# EAGLE board GW-RFM-RS485-V30-003 (EAGLE 7.7.0)
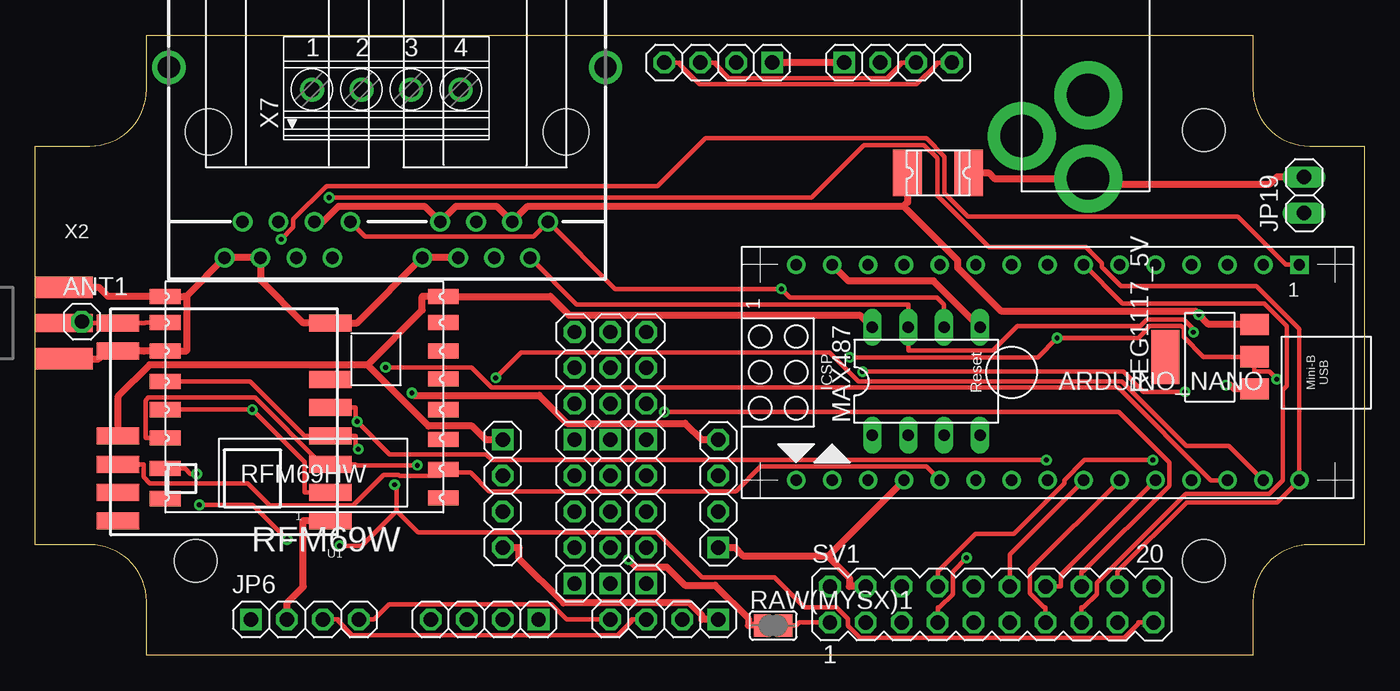
[diagram p0: board, top side]
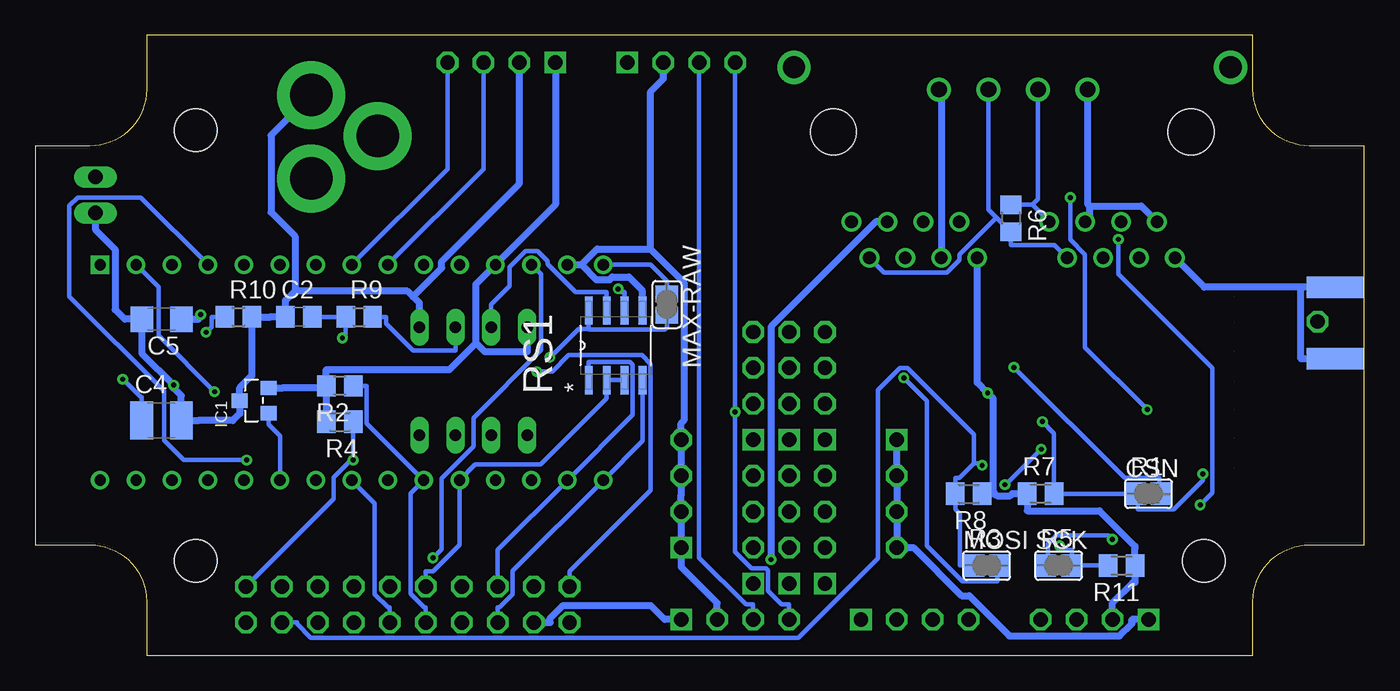
[diagram p1: board, bottom side, seen from below]

Size 93.9 x 43.83 mm. Coordinates in mm from the lower left corner, seen from the top.
Outline: 0,36.02 3.85,36.02 arc90 7.85,40.02 7.85,43.83 86.05,43.83 86.05,40.02 arc90 90.05,36.02 93.9,36.02 93.9,7.82 90.05,7.82 arc90 86.05,3.81 86.05,0 7.85,0 7.85,3.81 arc90 3.85,7.82 0,7.82 0,36.02
Copper layers (1*16): Top 0.035mm / dielectric 1.5mm / Bottom 0.035mm
Design rules "default": minimum track width 6mil, minimum drill 0.35mm, track to track 6mil, track to pad 6mil, pad to pad 6mil, via to via 6mil, smd to smd 6mil, copper to edge 40mil, drill to drill 6mil, minimum pad ring 10mil, minimum via ring 8mil, stop-mask expansion 4mil, vias tented up to drill 0mil, thermal gap 10mil
Net classes: 0 default: width 0.305 mm; 1 Power: width 0.508 mm
Holes 3 mm at 11.32,6.69 82.58,6.69 82.58,37.14

## Footprints (pad centres in the part's own frame; a part is rotated, then mirrored left to right if it is on the bottom)
1X01 = drill 1.016 octagon: 1 0,0
ARDUINO_NANO = drill 0.8 square: 1 -20.32,-7.62 | drill 0.8: 2 -17.78,-7.62; 3 -15.24,-7.62; 4 -12.7,-7.62; 5 -10.16,-7.62; 6 -7.62,-7.62; 7 -5.08,-7.62; 8 -2.54,-7.62; 9 0,-7.62; 10 2.54,-7.62; 11 5.08,-7.62; 12 7.62,-7.62; 13 10.16,-7.62; 14 12.7,-7.62; 15 15.24,-7.62; 16 15.24,7.62; 17 12.7,7.62; 18 10.16,7.62; 19 7.62,7.62; 20 5.08,7.62; 21 2.54,7.62; 22 0,7.62; 23 -2.54,7.62; 24 -5.08,7.62; 25 -7.62,7.62; 26 -10.16,7.62; 27 -12.7,7.62; 28 -15.24,7.62; 29 -17.78,7.62; 30 -20.32,7.62
C0805 = smd 1.3 x 1.5: 1 -0.95,0; 2 0.95,0
C1210 = smd 1.6 x 2.7: 1 -1.4,0; 2 1.4,0
C1206 = smd 1.6 x 1.8: 1 -1.4,0; 2 1.4,0
SJ = smd 1.168 x 1.6: 1 -0.762,0; 2 0.762,0
1812L = smd 2.03 x 3.3: P$1 -2.16,0; P$2 2.16,0
SOT23 = smd 1.016 x 1.143: 1 -0.889,-1.016; 2 0.889,-1.016; 3 0,1.016
557570-1 = drill 0.889: 1-1 -11.43,6.35; 1-2 -10.16,8.89; 1-3 -8.89,6.35; 1-4 -7.62,8.89; 1-5 -6.35,6.35; 1-6 -5.08,8.89; 1-7 -3.81,6.35; 1-8 -2.54,8.89; 2-1 2.54,6.35; 2-2 3.81,8.89; 2-3 5.08,6.35; 2-4 6.35,8.89; 2-5 7.62,6.35; 2-6 8.89,8.89; 2-7 10.16,6.35; 2-8 11.43,8.89 | drill 1.575 pad 2.184: G1 -15.494,-4.572; G3 15.367,-4.572 | hole 3.251: -12.7,0; 12.573,0
1X04-S = drill 1.016 square: 1 -3.81,0 | drill 1.016 octagon: 2 -1.27,0; 3 1.27,0; 4 3.81,0
1X02 = drill 1.016 long: 1 -1.27,0; 2 1.27,0
DIL08 = drill 0.813 long: 1 -3.81,-3.81; 2 -1.27,-3.81; 3 1.27,-3.81; 4 3.81,-3.81; 5 3.81,3.81; 6 1.27,3.81; 7 -1.27,3.81; 8 -3.81,3.81
M0805 = smd 1.3 x 1.6: 1 -0.95,0; 2 0.95,0
R0805 = smd 1.3 x 1.5: 1 -0.95,0; 2 0.95,0
SOT223 = smd 1.499 x 2.007: 1 -2.261,-3.15; 2 0.025,-3.15; 3 2.311,-3.15 | smd 3.81 x 2.007: 4 0,3.15
RFM = smd 2.184 x 1.067: ANT 19.651,2.889; DIO0 0,13.27; DIO1 0,11.143; DIO2 0,9.047; DIO3 0,6.889; DIO4 0,4.889; DIO5 0,2.889; GNDA 19.651,4.889; GNDB 19.651,1.048; MISO 19.651,9.047; MOSI 19.651,11.047; NC 19.651,15.334; NSS 19.651,13.206; RESET 0,15.27; SCK 19.651,7.048; VCC 0,1.048
SOIC127P600X175-8N = smd 1.981 x 0.533: 1 -2.464,1.905; 2 -2.464,0.635; 3 -2.464,-0.635; 4 -2.464,-1.905; 5 2.464,-1.905; 6 2.464,-0.635; 7 2.464,0.635; 8 2.464,1.905
MA10-2 = drill 1.016 octagon: 1 -11.43,-1.27; 2 -11.43,1.27; 3 -8.89,-1.27; 4 -8.89,1.27; 5 -6.35,-1.27; 6 -6.35,1.27; 7 -3.81,-1.27; 8 -3.81,1.27; 9 -1.27,-1.27; 10 -1.27,1.27; 11 1.27,-1.27; 12 1.27,1.27; 13 3.81,-1.27; 14 3.81,1.27; 15 6.35,-1.27; 16 6.35,1.27; 17 8.89,-1.27; 18 8.89,1.27; 19 11.43,-1.27; 20 11.43,1.27
RFM69HCW-XXXS2 = smd 3 x 1.2: 3.3V 7.5,1; ANT 7.5,-7; DIO0 7.5,3; DIO1 7.5,5; DIO2 7.5,7; GND_1 7.5,-5; GND_2 -7.5,-7; GND_3 -7.5,7; MISO -7.5,5; MOSI -7.5,3; NSS -7.5,-1; RESET -7.5,-3; SCK -7.5,1
PJ-102A = drill 3 pad 4.8: RING 0.1,-3.39; RING_SW -4.6,-6.29; TIP 0.1,-9.29
SMA_EDGELAUNCH = smd 4.064 x 1.524: GND@1 2.032,-2.54; GND@2 2.032,2.54 | smd 4.064 x 1.524 bottom: GND@3 2.032,2.54; GND@4 2.032,-2.54 | smd 4.064 x 1.27: P 2.032,0
1751264 = drill 1.1 pad 1.7: 1 -5.25,-0.1; 2 -1.75,-0.1; 3 1.75,-0.1; 4 5.25,-0.1

## Placement (x,y rotation side)
ANT1  [1X01]  3.29,23.6 0 top
ARDUINO_NANO  [ARDUINO_NANO]  69,20 180 top
C2  22p  [C0805]  75.27,23.93 0 bottom
C4  10uF  [C1210]  84.99,16.6 0 bottom
C5  0.1uF  [C1206]  84.98,23.77 180 bottom
CSN  [SJ]  15.24,11.43 0 bottom
F1  1812L  [1812L]  63.79,34.11 0 top
IC1  ATSHA204A  [SOT23]  78.44,18.01 90 bottom
J2  [557570-1]  24.8,37 180 top
JP1  [1X04-S]  48.26,11.43 90 top
JP2  [1X04-S]  43.18,8.89 90 top
JP3  [1X04-S]  33.02,11.43 270 top
JP4  [1X04-S]  38.1,8.89 90 top
JP5  [1X04-S]  31.75,2.54 180 top
JP6  [1X04-S]  19.05,2.54 0 top
JP7  [1X04-S]  43.18,19.05 90 top
JP10  [1X04-S]  44.45,2.54 180 top
JP11  [1X04-S]  40.64,8.89 90 top
JP12  [1X04-S]  40.64,19.05 90 top
JP15  [1X04-S]  38.1,19.05 90 top
JP17  [1X04-S]  60.96,41.91 0 top
JP18  [1X04-S]  48.26,41.91 180 top
JP19  [1X02]  89.67,32.55 90 top
MAX487  MAX481CPA  [DIL08]  62.95,19.38 0 top
MAX-RAW  [SJ]  49.27,24.81 270 bottom
MOSI  [SJ]  26.67,6.35 0 bottom
R1  4K7  [M0805]  15.24,11.43 0 bottom
R2  [R0805]  72.39,19.05 180 bottom
R3  4K7  [M0805]  26.67,6.35 0 bottom
R4  10k  [M0805]  72.39,16.51 180 bottom
R5  4K7  [M0805]  21.59,6.35 0 bottom
R6  150R  [R0805]  24.97,30.9 270 bottom
R7  10K  [M0805]  22.86,11.43 0 bottom
R8  10K  [M0805]  27.94,11.43 180 bottom
R9  330R  [R0805]  71.02,23.93 0 bottom
R10  330R  [R0805]  79.55,23.93 0 bottom
R11  10K  [M0805]  17.14,6.35 180 bottom
RAW(MYSX)1  open  [SJ]  52.14,2.11 0 top
REG1117_5V  REG1117  [SOT223]  83,21.09 90 top
RFM69W  RFM69HW  [RFM]  28.83,26.42 180 top
RS1  MAX487ECSA+  [SOIC127P600X175-8N]  52.9,21.91 90 bottom
SCK  [SJ]  21.59,6.35 0 bottom
SV1  [MA10-2]  67.58,3.6 0 top
U1  RFM69HCW  [RFM69HCW-XXXS2]  13.34,16.51 180 top
U$3  2.1MMJACKTHM  [PJ-102A]  74.31,43 0 top
X2  [SMA_EDGELAUNCH]  0,23.5 0 top
X7  1751264  [1751264]  24.8,40.1 0 top

## Library data of the parts
ANT1 JP19 = pinhead
ARDUINO_NANO = ArduinoNanoV30
C2 = rcl; SPICEPREFIX: C
C4 C5 = rcl@1; SPICEPREFIX: C
CSN MAX-RAW MOSI SCK = jumper@1
F1 = ptc-littlefuse
IC1 = Sensor
J2 = con-amp
JP1-JP7 JP10-JP12 JP15 JP17 JP18 = pinhead-2
MAX487 = maxim-4
R1-R11 = rcl
RAW(MYSX)1 = jumper
REG1117_5V = burr-brown; MPN: REG1117; OC_FARNELL: 1097566; OC_NEWARK: 14P6981
RFM69W = hoperf
RS1 = Maxim_By_element14_Batch_1; MPN: MAX487ECSA+; OC_FARNELL: 9724532; OC_NEWARK: 68K4803; PACKAGE: SOIC-8; SUPPLIER: Maxim
SV1 = con-lstb; OC_FARNELL: unknown; OC_NEWARK: unknown
U1 = doug
U$3 X2 = adafruit
X7 = con-phoenix-350; MPN: 1751264; OC_FARNELL: unknown; OC_NEWARK: 10R0934

## Nets
3V3: ARDUINO_NANO.2 SV1.2
5V: C2.2 C4.1 MAX-RAW.2 R9.1 REG1117_5V.2 RS1.8
A: J2.1-1 J2.2-1 MAX487.6 R6.1 R9.2 RS1.6 X7.2
A0: ARDUINO_NANO.4 SV1.8
A1: ARDUINO_NANO.5
A2: ARDUINO_NANO.6
A3: ARDUINO_NANO.7 SV1.15
A4: ARDUINO_NANO.8 JP6.4 JP10.4 JP17.4 JP18.4 SV1.16
A5: ARDUINO_NANO.9 JP6.3 JP10.3 JP17.3 JP18.3
A6: ARDUINO_NANO.10
A7: ARDUINO_NANO.11
ANT: ANT1.1 RFM69W.ANT U1.ANT X2.P
B: J2.1-2 J2.2-2 MAX487.7 R6.2 R10.1 RS1.7 X7.3
CSN: CSN.1 R1.1 R4.1 R7.2 RFM69W.NSS SV1.20 U1.NSS
D3: ARDUINO_NANO.21 R2.1 SV1.9
D4: ARDUINO_NANO.22
D5: ARDUINO_NANO.23 SV1.11
D6: ARDUINO_NANO.24 SV1.12
D7/ATSHA: ARDUINO_NANO.25 IC1.1 SV1.13
D8: ARDUINO_NANO.26 SV1.14
D9: ARDUINO_NANO.27
GND [Power]: ARDUINO_NANO.14 ARDUINO_NANO.19 C2.1 C4.2 C5.2 IC1.3 J2.1-6 J2.1-8 J2.2-6 J2.2-8 JP1.1 JP1.2 JP1.3 JP1.4 JP6.2 JP10.2 JP17.2 JP18.2 JP19.1 MAX487.5 R7.1 R8.1 R10.2 R11.1 REG1117_5V.1 RFM69W.GNDA RFM69W.GNDB RS1.5 SV1.4 U1.GND_1 U1.GND_2 U1.GND_3 U$3.RING X2.GND@1 X2.GND@2 X2.GND@3 X2.GND@4 X7.4
IN [Power]: C5.1 F1.P$1 J2.1-3 J2.1-7 J2.2-3 J2.2-7 RAW(MYSX)1.1 REG1117_5V.3 X7.1
IRQ: ARDUINO_NANO.20 RFM69W.DIO0 RS1.2 RS1.3 SV1.10 U1.DIO0
MISO: ARDUINO_NANO.30 RFM69W.MISO SV1.18 U1.MISO
MOSI: MOSI.1 R3.1 R8.2 RFM69W.MOSI SV1.17 U1.MOSI
N$1: MAX487.2
N$2: J2.1-4
N$3: J2.1-5
N$4: MAX487.3
N$5: ARDUINO_NANO.1 R5.1 SCK.1
N$6: J2.2-4
N$7: J2.2-5
N$8: ARDUINO_NANO.28 CSN.2 R1.2
N$9: ARDUINO_NANO.29 MOSI.2 R3.2
N$10: MAX487.1
N$11: MAX487.4
N$12: U1.DIO2
N$13: U1.RESET
N$15: U1.DIO1
N$16: ARDUINO_NANO.3
N$22: ARDUINO_NANO.18
RAW: RAW(MYSX)1.2 SV1.1
RESET: ARDUINO_NANO.13 SV1.7
RW: ARDUINO_NANO.15 MAX-RAW.1
RX: ARDUINO_NANO.17 RS1.1 SV1.6
SCK: R5.2 R11.2 RFM69W.SCK SCK.2 SV1.19 U1.SCK
TX: ARDUINO_NANO.16 RS1.4 SV1.5
VCC [Power]: ARDUINO_NANO.12 IC1.2 JP3.1 JP3.2 JP3.3 JP3.4 JP6.1 JP10.1 JP17.1 JP18.1 MAX487.8 R2.2 R4.2 RFM69W.VCC SV1.3 U1.3.3V
VIN [Power]: F1.P$2 JP19.2 U$3.TIP

## Tracks (layer width: path | path; a pad name or v marks a point on that pad's centre or on a via)
3V3  (via drill 0.35 pad 0.76)
  Top 0.305: v81.24,18.64 78.3,18.64 76.88,20.06 v58.46,20.06
  Bottom 0.305: v58.46,20.06 57.37,20.06 56.21,21.22 51.03,21.22 50.42,20.61 50.42,11.66 56.15,5.94 SV1.2 | v81.24,18.64 85.2,22.6 85.2,26.04 ARDUINO_NANO.2
5V  (via drill 0.35 pad 0.76)
  Top 0.305: v57.54,21.07 70.84,21.07 v72.2,22.43 77.94,22.43 78.54,23.03 78.54,23.12 78.72,23.3 80.98,23.3 81.16,23.12 81.16,22.49 82.54,21.11 84.84,21.11 REG1117_5V.2 86.15,20.06 87.2,20.06 v87.73,19.52
  Bottom 0.305: 54.8,23.08 55.52,23.08 v57.54,21.07 | 54.8,23.08 54.75,23.03 49.4,23.03 49.27,23.16 MAX-RAW.2 | 54.8,23.08 54.8,23.2 RS1.8 | v72.2,22.43 71.97,22.67 R9.1 72.92,23.93 C2.2 | v87.73,19.52 86.47,18.25 86.39,18.25 C4.1
A  (via drill 0.35 pad 0.76)
  Top 0.305: MAX487.6 64.22,24.81 63.73,25.31 53.32,25.31 v52.71,25.91 40.97,25.91 J2.1-1 35.2,29.61 23.3,29.61 J2.2-1
  Bottom 0.305: v52.71,25.91 52.47,25.67 52.27,25.67 RS1.6 | R9.2 69.11,23.93 69.11,23.45 67.22,21.56 64.22,21.56 MAX487.6 | 23.46,31.85 R6.1 | J2.2-1 23.46,31.85 | X7.2 23.05,32.26 23.46,31.85
A0  (via drill 0.35 pad 0.76)
  Top 0.305: v78.97,13.8 74.13,13.8 72.7,12.38 72.7,12.16 69.14,8.6 66.43,8.6 63.77,5.94 SV1.8
  Bottom 0.305: v78.97,13.8 83.41,13.8 84.81,15.2 84.81,18.67 91.5,25.36 91.5,31.78 90.9,32.38 86.45,32.38 ARDUINO_NANO.4
A3
  Top 0.305: ARDUINO_NANO.7 76.83,24.87 86.86,24.87 88.43,23.3 88.43,19.03 88.15,18.75 88.15,12.37 87.18,11.4 81.29,11.4 75,5.11 75,4.33 74.06,3.4 73.93,3.4 SV1.15
A4  (via drill 0.35 pad 0.76)
  Top 0.305: v44.45,17.21 76.57,17.21 80.12,13.65 80.12,11.98 74.08,5.94 73.93,5.94 SV1.16 | JP10.4 37.53,2.54 36.47,3.61 24.99,3.61 23.93,2.54 JP6.4 | JP17.4 63.7,41.91 63.7,41.8 62.27,40.36 46.93,40.36 45.52,41.78 45.52,41.91 JP18.4
  Bottom 0.305: ARDUINO_NANO.8 64.77,34.39 JP17.4 | JP18.4 44.45,40.84 v44.45,17.21 44.45,7.32 43.28,6.15 42.26,6.15 42.11,6 42.11,4.56 41.16,3.61 40.64,3.61 JP10.4
A5
  Top 0.305: JP17.3 61.16,41.91 61.16,41.8 60.18,40.82 49.01,40.82 48.06,41.78 48.06,41.91 JP18.3 | JP6.3 21.39,2.54 21.39,2.43 22.38,1.43 41.14,1.43 42.11,2.41 42.11,2.54 JP10.3
  Bottom 0.305: JP10.3 43.18,3.61 43.7,3.61 46.99,6.9 46.99,40.84 JP18.3 | JP17.3 62.23,34.39 ARDUINO_NANO.9
ANT  (1 unrouted)
  Top 0.305: X2.P 2.12,23.5 2.22,23.6 ANT1.1 3.94,23.6 4.03,23.51 U1.ANT 7.76,23.51 7.78,23.53 RFM69W.ANT
B  (via drill 0.35 pad 0.76)
  Top 0.305: J2.1-2 38.26,24.81 61.68,24.81 MAX487.7 61.68,21.56 67.67,21.56 69.4,23.3 78.07,23.3 | v81.84,22.84 81.84,23.08 81.17,23.75 78.53,23.75 78.07,23.3 | 78.07,23.3
  Bottom 0.305: RS1.7 53.53,25.67 55.72,25.67 57.71,27.66 57.71,27.88 58.41,28.58 59.25,28.58 60.37,27.45 60.37,26.12 61.68,24.81 MAX487.7 | v81.84,22.84 81.45,23.23 81.45,23.93 R10.1 | J2.2-2 21.88,29 24.97,29 R6.2 25.98,30.96 | X7.3 26.55,31.53 25.98,30.96 | 25.98,30.96 28.61,28.33 28.61,27.94 29.47,27.08 33.93,27.08 J2.1-2
CSN  (via drill 0.35 pad 0.76)  (1 unrouted)
  Top 0.305: v71.44,13.8 32.28,13.8 31.87,14.22 25.05,14.22 v22.74,16.52 22.64,16.62 22.64,17.51 U1.NSS | RFM69W.NSS 10.57,13.21 10.95,12.83 v11.4,12.83
  Bottom 0.305: SV1.20 72.81,11.07 72.81,12.57 71.58,13.8 v71.44,13.8 71.44,15.96 R4.1 | v22.74,16.52 21.91,15.7 R7.2 17.14,11.43 R1.1 CSN.1 16,10.32 13.44,10.32 11.4,12.36 v11.4,12.83
D3
  Bottom 0.305: R2.1 70.48,19.05 70.48,16.41 ARDUINO_NANO.21 67.39,11.46 67.39,4.34 66.44,3.4 66.31,3.4 SV1.9
D5
  Bottom 0.305: SV1.11 68.85,3.4 68.98,3.4 69.92,4.33 69.92,10.76 ARDUINO_NANO.23
D6
  Top 0.305: SV1.12 68.85,7.15 ARDUINO_NANO.24
D7/ATSHA
  Top 0.305: SV1.13 71.39,3.4 71.26,3.4 70.28,4.38 70.28,6.04 ARDUINO_NANO.25
  Bottom 0.305: IC1.1 77.42,16.31 76.62,15.5 ARDUINO_NANO.25
D8
  Top 0.305: SV1.14 72.46,4.87 72.46,5.68 ARDUINO_NANO.26
GND  (via drill 0.35 pad 0.76)  (2 unrouted)
  Top 0.508: JP1.1 49.43,7.62 50.04,7.01 56.01,7.01 | 56.01,7.01 57.52,5.49 57.52,4.87 SV1.4 | ARDUINO_NANO.19 56.01,7.01 | JP6.2 17.78,3.71 18.93,4.86 18.93,9.51 U1.GND_3 | REG1117_5V.1 84.74,18.82 84.46,19.1 v84.13,19.1 | v26.61,18.55 26.78,18.38 35.6,18.38 37.57,16.41 45.92,16.41 47.09,15.24 JP1.4 | J2.1-6 J2.1-8 22.74,23.51 U1.GND_2 18.93,23.51 15.91,26.53 J2.2-6 J2.2-8 10.68,25.42 10.68,25.37 | 10.68,25.37 10.68,21.53 RFM69W.GNDA 7.68,21.53 7.66,21.51 U1.GND_1 5.03,21.51 4.47,20.95 X2.GND@1 | 10.68,25.37 10.51,25.37 RFM69W.GNDB 5.14,25.37 4.47,26.04 X2.GND@2 | MAX487.5 63.48,26.46 57.45,26.46 ARDUINO_NANO.14
  Bottom 0.508: 55.32,27.61 54.2,28.73 50.42,28.73 | ARDUINO_NANO.14 55.33,27.62 55.32,27.61 | 55.32,27.61 54.27,26.56 53.32,26.56 53.13,26.75 51.97,26.75 50.99,25.78 RS1.5 | 50.42,28.73 48.06,26.37 48.06,16.61 48.26,16.41 JP1.4 JP1.3 48.26,11.33 JP1.2 JP1.1 48.26,6.25 45.72,3.71 JP10.2 | 50.42,28.73 50.42,39.85 49.53,40.74 JP18.2 | 26.2,11.55 26.2,18.15 v26.61,18.55 27.34,19.29 J2.1-8 | R8.1 26.32,11.43 26.2,11.55 | 26.2,11.55 25.94,11.28 25.01,11.28 24.87,11.43 R7.1 23.81,10.22 18.71,10.22 16.2,7.71 16.2,7.56 R11.1 16.2,5.14 16.34,5.14 17.78,3.71 JP6.2 | 67.21,25.36 67.6,25.75 75.55,25.75 | 67.21,25.36 66.76,24.91 MAX487.5 | 67.21,25.36 65.19,27.38 65.19,27.86 59.69,33.35 JP17.2 | 75.55,25.75 76.22,25.09 C2.1 77.28,23.93 R10.2 78.6,19.78 79.46,18.92 IC1.3 79.46,17.1 79.95,16.6 82.38,16.6 C4.2 83.59,18.36 84.13,18.89 v84.13,19.1 86.38,21.36 C5.2 86.81,23.77 87.59,23.77 88.26,24.44 88.26,28.7 89.67,30.11 JP19.1 | U$3.RING 77.25,36.77 77.25,31.32 75.55,29.63 75.55,25.75 | X7.4 29.88,39.83 J2.1-6 | 4.47,26.04 11.29,26.04 J2.2-8 | 4.47,26.04 4.3,26.04 X2.GND@2 | X2.GND@1 4.47,20.95 4.47,26.04
IN  (via drill 0.35 pad 0.76)
  Top 0.508: 61.36,31.75 65.19,27.92 65.19,27.39 68.27,24.31 81.98,24.31 v82.21,24.09 82.9,23.4 REG1117_5V.3 | 61.36,31.75 34.8,31.75 J2.1-3 32.59,31.75 29.71,31.75 J2.1-7 27.5,31.75 21.43,31.75 20.32,30.65 J2.2-3 | 61.36,31.75 61.63,32.03 61.63,32.05 F1.P$1 | RAW(MYSX)1.1 50.39,2.11 50.39,2.6 48.03,4.96 45.9,4.96 44.61,6.25 42.43,6.25 v41.91,6.77
  Bottom 0.508: 19.41,31.76 19.41,30.96 J2.2-3 | X7.1 19.55,31.9 19.41,31.76 | 19.41,31.76 15.75,31.76 J2.2-7 | J2.1-3 34.5,30.65 41.91,23.24 v41.91,6.77 | v82.21,24.09 82.37,23.92 82.37,23.77 C5.1
IRQ
  Top 0.305: ARDUINO_NANO.20 62.96,13.34 51.25,13.34 49.51,11.61 32.05,11.61 30.74,12.92 28.83,12.92 | 28.83,12.92 28.6,12.69 25.73,12.69 25.65,12.76 24.62,12.76 22.46,10.61 16.55,10.61 15,12.15 8.1,12.15 7.64,12.61 7.64,13.51 U1.DIO0 | 28.83,12.92 RFM69W.DIO0
  Bottom 0.305: SV1.10 66.31,5.94 65.79,5.94 63.92,7.81 ARDUINO_NANO.20 62.81,13.49 58.2,13.49 53.53,18.16 RS1.2 RS1.3
MISO  (via drill 0.35 pad 0.76)  (1 unrouted)
  Top 0.305: U1.MISO 19.03,11.51 19.03,13.67 v15.33,17.37 RFM69W.MISO | v20.76,32.36 54.84,32.36 58.55,36.06 62.8,36.06 63.73,35.14 63.73,32.51 67.39,28.85 74.23,28.85 75.35,27.72 75.35,27.47 76.71,26.11 86.28,26.11 89.32,23.06 ARDUINO_NANO.30 87.76,10.82 81.36,10.82 76.47,5.94 SV1.18
  Bottom 0.305: v15.33,17.37 19.72,21.76 19.72,28.34 20.76,29.38 v20.76,32.36
MOSI  (via drill 0.35 pad 0.76)  (1 unrouted)
  Top 0.305: RFM69W.MOSI 7.78,15.37 7.78,18.03 7.98,18.23 15.53,18.23 20.25,13.51 U1.MOSI 21.74,13.51 22.64,13.51 22.71,13.44 v26.99,13.44
  Bottom 0.305: 27.58,13.56 27.58,15.63 32.27,20.32 32.8,20.32 34.37,18.75 34.37,6.85 39.97,1.25 74.43,1.25 75.4,2.22 75.4,2.33 SV1.17 | 27.58,13.56 28.6,12.54 28.89,12.54 R8.2 28.89,10.32 28.57,10.01 28.57,6.35 R3.1 MOSI.1 | v26.99,13.44 27.11,13.56 27.58,13.56
N$5  (via drill 0.35 pad 0.76)
  Top 0.305: v17.36,29.41 18.22,30.27 18.22,30.83 20.57,33.18 43.97,33.18 47.34,36.55 62.97,36.55 64.26,35.27 64.26,32.66 65.91,31 84.98,31 88.36,27.62 ARDUINO_NANO.1 | v17.8,8.2 15.37,10.63 v11.59,10.63
  Bottom 0.305: v11.59,10.63 10.72,11.5 10.72,20.31 17.36,26.95 v17.36,29.41 | v17.8,8.2 18.07,8.48 21.75,8.48 22.35,7.88 22.35,7.46 SCK.1 R5.1
N$8  (via drill 0.35 pad 0.76)
  Top 0.305: v24.75,20.37 30.82,20.37 32.25,18.94 57.94,18.94 57.96,18.92 76.52,18.92 83.06,12.38 ARDUINO_NANO.28
  Bottom 0.305: v24.75,20.37 16.92,12.54 14.48,12.54 CSN.2 R1.2
N$9  (via drill 0.35 pad 0.76)
  Top 0.305: v32.53,19.62 34.33,21.41 56.12,21.41 58.15,19.38 76.76,19.38 81.32,14.82 84.34,14.82 ARDUINO_NANO.29
  Bottom 0.305: v32.53,19.62 30.91,17.99 30.91,7.75 28.4,5.25 25.91,5.25 MOSI.2 R3.2
RAW
  Top 0.305: RAW(MYSX)1.2 53.79,2.11 54.01,2.33 SV1.1
RESET  (via drill 0.35 pad 0.76)
  Top 0.305: SV1.7 63.77,3.4 63.9,3.4 64.84,4.33 64.84,5.92 v65.81,6.89
  Bottom 0.305: v65.81,6.89 65.19,7.51 65.19,12.52 62.95,14.76 62.95,16.8 58.17,21.58 58.17,26.95 ARDUINO_NANO.13
RW
  Bottom 0.305: MAX-RAW.1 49.27,26.46 50.43,27.62 ARDUINO_NANO.15
RX
  Bottom 0.305: RS1.1 54.8,20.75 51.87,20.75 51.69,20.57 51.69,16.99 ARDUINO_NANO.17 61.23,7.45 SV1.6
SCK  (via drill 0.35 pad 0.76)  (1 unrouted)
  Top 0.305: 25.53,10.22 27.05,8.71 43.91,8.71 47.1,5.52 52.23,5.52 54.35,3.4 56.6,3.4 57.42,2.58 57.42,2.09 58.27,1.24 76.96,1.24 77.94,2.22 77.94,2.33 SV1.19 | v22.82,14.58 22.64,14.76 22.64,15.51 U1.SCK 19.03,15.51 15.17,19.37 10.57,19.37 RFM69W.SCK | 25.53,10.22 25.53,11.91 v25.38,12.07 | 25.53,10.22 23.06,7.75 v21.52,7.75
  Bottom 0.305: v25.38,12.07 25.33,12.07 v22.82,14.58 | R5.2 20.64,7.46 21.22,7.46 v21.52,7.75 | R11.2 19.68,6.35 R5.2 | SCK.2 R5.2
TX
  Bottom 0.305: RS1.4 50.99,15.14 ARDUINO_NANO.16 60.16,5.98 60.16,4.33 61.1,3.4 61.23,3.4 SV1.5
VCC
  Top 0.508: MAX487.8 58.27,24.06 37.71,24.06 36.4,25.37 RFM69W.VCC 27.33,25.37 27.33,24.4 23.46,20.53 | JP17.1 JP18.1 | 23.46,20.53 8.07,20.53 5.83,18.3 U1.3.3V | 23.46,20.53 27.78,16.21 30.88,16.21 31.85,15.24 JP3.1 | JP3.4 34.19,7.62 34.19,6.84 37.32,3.71 46.22,3.71 47.09,2.83 47.09,2.54 JP10.1
  Bottom 0.508: 62.77,22.09 62.77,26.23 ARDUINO_NANO.12 57.15,31.85 JP17.1 | 62.77,22.09 62.14,21.46 59.14,21.46 MAX487.8 | 62.77,22.09 64.64,20.21 73.34,20.21 R2.2 73.34,18.9 | 73.34,18.9 R4.2 | 73.34,18.9 76.45,18.9 IC1.2 | JP6.1 16.41,2.54 16.41,2.25 17.29,1.37 25.07,1.37 27.91,4.21 28.45,4.21 31.85,7.62 JP3.4 JP3.3 JP3.2 JP3.1 | JP10.1 49.43,2.54 50.42,3.53 56.61,3.53 57.52,2.62 57.52,2.33 SV1.3
VIN
  Top 0.508: JP19.2 87.73,33.81 87.25,33.33 74.79,33.33 U$3.TIP 67.77,33.71 67.37,34.11 F1.P$2